# Altium PCB PCB1.PcbDoc
Units mil, origin at the board's own origin, x right, y up, seen from the top; angles counter-clockwise.
Board outline 870.11 x 476.41 mil, 2 copper layers (Top Layer, Bottom Layer); 27 components, 29 nets, 127 pads, 42 vias.
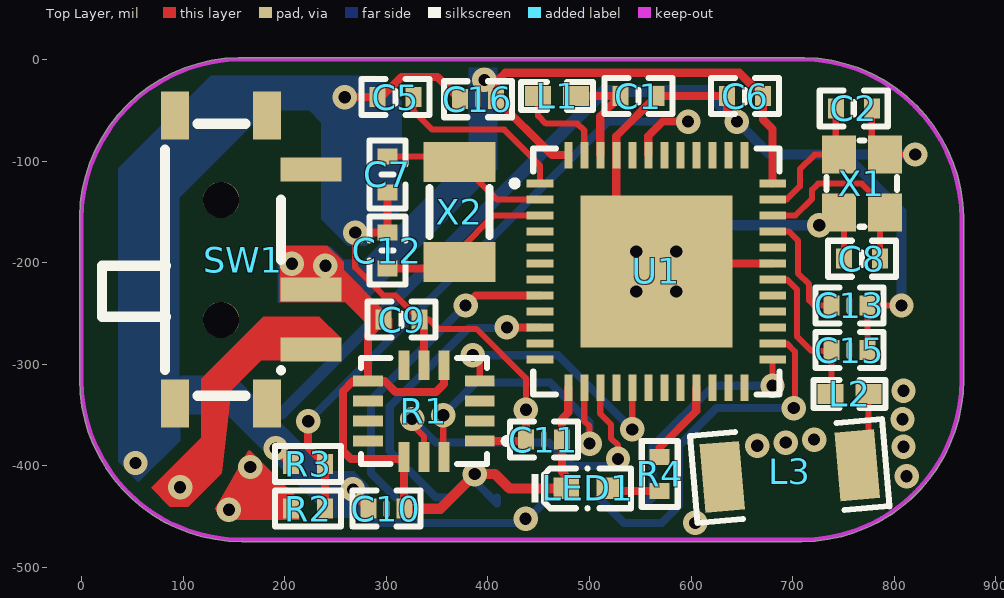
[diagram p0: Top Layer view]
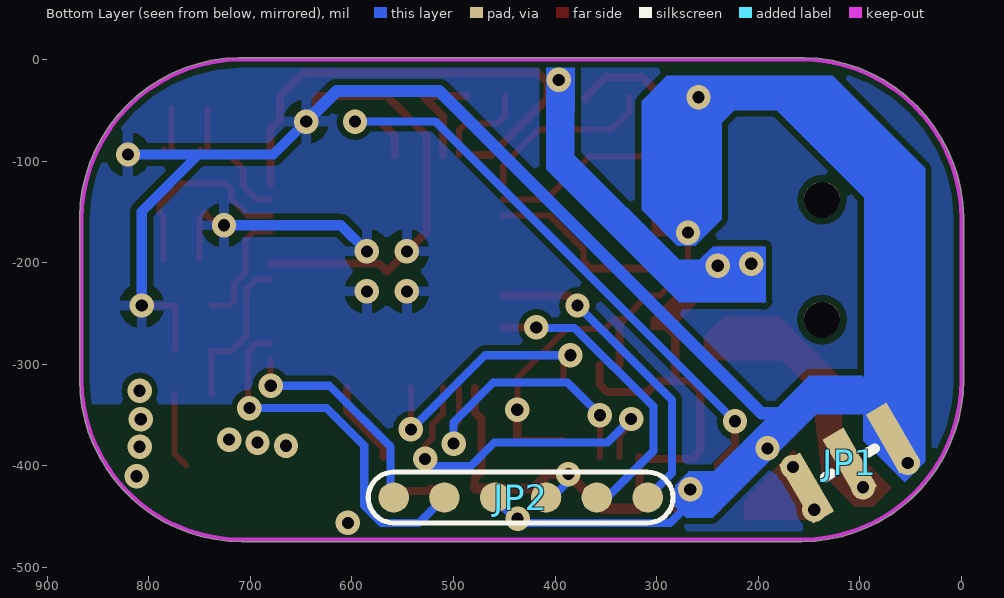
[diagram p1: Bottom Layer view, seen from below]
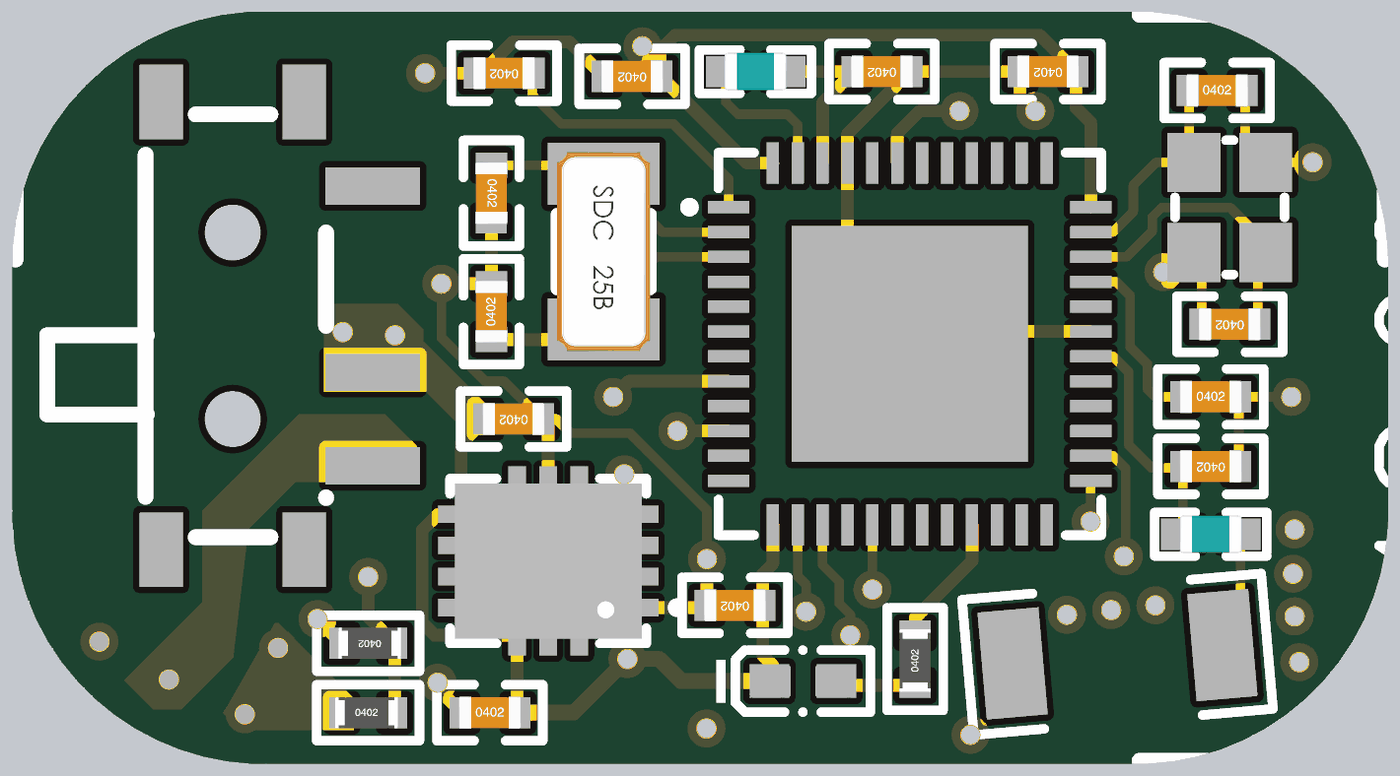
[diagram p2: 3D render of the assembled board from above, using the file's embedded part models]

## Layer stack, top to bottom
Top Solder: solder mask 0.4, Solder Resist, Dk 3.5
Top Layer: signal copper 1.4
Dielectric 1: dielectric 12.6, FR-4, Dk 4.8
Bottom Layer: signal copper 1.4
Bottom Solder: solder mask 0.4, Solder Resist, Dk 3.5

## Board outline
-1.98,-314.96 cw(c0,-314.96) -1.72,-313.98 cw(c0,-313) -1.98,-313 -1.98,-155 cw(c0,-155) -1.96,-154.69 cw(c157.48,-157.48) 154.69,1.96 cw(c155,0) 155,1.98 711,1.98 cw(c711,0) 711.29,1.96 cw(c708.66,-157.48) 868.1,-154.85 cw(c866.14,-155.14) 868.13,-155.14 868.13,-314.86 cw(c866.14,-314.86) 868.12,-314.91 cw(c866.14,-314.96) 868.13,-314.96 cw(c708.66,-314.96) 708.66,-474.42 cw(c708.66,-472.44) 708.61,-474.42 cw(c708.56,-472.44) 708.56,-474.42 159.44,-474.42 cw(c159.44,-472.44) 158.46,-474.17 cw(c157.48,-472.44) 157.48,-474.42 cw(c157.48,-314.96)

## Design rules (kind name [scope] priority, off if disabled: settings)
Clearance [All] p1: gap=6 ignorepadtopadclearanceinfootprint=FALSE except(0: Arc-Hole Track-Hole SMDPad-Hole THPad-Hole Via-Hole Fill-Hole Poly-Hole Region-Hole Text-Hole)
HoleToHoleClearance [All] p1: gap=4 allowstackedmicrovias=TRUE
MinimumSolderMaskSliver [All] p1: minsoldermaskwidth=4
PolygonConnect [All] p1: connectstyle=Relief reliefconductorwidth=10 reliefentries=4 polygonreliefangle="90 Angle" airgapwidth=10
RoutingVias [All] p1: holewidth=12 width=24 viastyle="Through Hole" minholewidth=12 minwidth=24 maxholewidth=15 maxwidth=25
SilkToSilkClearance [All] p1: silktosilkclearance=1
SilkToSolderMaskClearance [IsPad] p1: minsilkscreentomaskgap=0 clearancetoexposedcopper=TRUE
SolderMaskExpansion [All] p1: expansion=4
Width [All] p1: maxlimit=50 minlimit=6 preferedwidth=6
26 further rules are at their usual default settings.

## Components (designator, comment, footprint, x,y, rotation, side; value= is the part's Value field where it differs from the comment)
C1 "1.0µF" "C 0402_L" 548,-36 r180 top value=1.0μF
C2 "12pF" "C 0402_L" 760,-48 r0 top
C5 "100nF" "C 0402_L" 309,-37 r180 top
C6 "4.7µF" "C 0402_L" 653,-36 r180 top value=4.7μF
C7 "12pF" "C 0402_L" 301,-113 r270 top
C8 "12pF" "C 0402_L" 768,-196 r180 top
C9 "2.2uF" "C 0402_L" 315,-256 r180 top
C10 "0.1uF" "C 0402_L" 300,-442 r0 top
C11 "100nF" "C 0402_L" 455,-374 r180 top
C12 "12pF" "C 0402_L" 301,-188 r90 top
C13 "100pF" "C 0402_L" 756,-242 r0 top
C15 "0.8pF" "C 0402_L" 756,-286 r180 top
C16 "100nF" "C 0402_L" 390,-39 r180 top
JP1 "HDR-1X3" bat_3p 46.75,-445.77 r150 bottom
JP2 "HDR-1X6" SWD_nRF52832 559,-431 r270 bottom
L1 "10uH" INDC1005X04L 468,-36 r0 top value=3.9nH
L2 "3.9nH" INDC1005X04L 756,-329 r0 top
L3 "陶瓷天线" ANT-SMD_L3.1-W1.6 697,-405 r5 top
LED1 "白色" LED0402-RD_BLUE 498,-422 r0 top
R1 "ICM-42605/ QMI8658C" ICM-42605 335,-340 r180 top
R2 "20K" "R 0402_L" 222,-442 r0 top
R3 "5K" "R 0402_L" 224,-398 r180 top
R4 "880R" "R 0402_L" 569,-409 r90 top
SW1 "MSK12C02" SW-TH_MSK12C02 159,-197 r270 top
U1 "nRF52832-QFAA" QFN-48_L6.0-W6.0-P0.40-BL-EP3.8 565.61,-208.47 r270 top
X1 "32MHz" BT-XTAL_2016 768,-122 r90 top
X2 "32.768kHz" XTAL_3215 372,-150 r270 top

## Footprints (in the part's own frame and the unit in brackets; to place one, negate y for a bottom-side part, rotate by r counter-clockwise, add the part's x,y. Pads: shape width x height; smd on the part's side, far side on the other; paste and mask are expansions set on the pad)
ANT-SMD_L3.1-W1.6 [mil]
  rect 38.73x68.03 smd: 1(-66.61,0) 2(66.61,0)
  silkscreen extent -95,-43 95,43
bat_3p [mm]
  rect 0.6x1.7 smd: 1(0.478,1.876) 2(-0.772,1.876) 3(-2.022,1.876)
  silkscreen extent -1.49,1.88 -0.05,1.88
BT-XTAL_2016 [mm] "Crystal 2.0 x 1.6 mm"
  rect 0.95x0.85 smd: 1(-0.725,-0.575) 2(0.725,-0.575) 3(0.725,0.575) 4(-0.725,0.575)
  silkscreen extent -1.08,-0.88 1.08,0.88
"C 0402_L" [mm] "无极性贴片电容"
  rect 0.4x0.5 smd: 1(-0.45,0) 2(0.45,0)
  silkscreen extent -0.85,-0.45 0.85,0.45, body extent -0.5,-0.26 0.5,0.26, height 0.53
ICM-42605 [mm]
  rect 0.745x0.28 smd: 1(-1.445,0.901) 2(-1.445,0.401) 3(-1.445,-0.099) 4(-1.445,-0.599) 8(1.35,-0.599) 9(1.35,-0.099) 10(1.35,0.401) 11(1.35,0.901)
  rect 0.28x0.745 smd: 5(-0.548,-0.997) 6(-0.048,-0.997) 7(0.452,-0.997) 12(0.452,1.298) 13(-0.048,1.298) 14(-0.548,1.298)
  silkscreen extent -2.19,-1.18 1.53,1.48, body extent -1.55,-1.1 1.45,1.4, height 0.9
INDC1005X04L [mm] "Chip Inductor, 2-Leads, Body 1.0x0.5mm, IPC High Density"
  rect 0.65x0.5 smd: 1(-0.475,0) 2(0.475,0)
  silkscreen extent -0.9,-0.35 0.9,0.35, body extent -0.5,-0.3 0.5,0.3, height 0.5
LED0402-RD_BLUE [mm]
  rect 0.636x0.54 smd: 1(-0.538,0) 2(0.538,0)
  silkscreen extent -1.39,-0.54 1.09,0.54
QFN-48_L6.0-W6.0-P0.40-BL-EP3.8 [mm]
  rect 0.2x0.665 smd: 1(-2.2,-2.908) 2(-1.8,-2.908) 3(-1.4,-2.908) 4(-1,-2.908) 5(-0.6,-2.908) 6(-0.2,-2.908) 7(0.2,-2.908) 8(0.6,-2.908) 9(1,-2.908) 10(1.4,-2.908) 11(1.8,-2.908) 12(2.2,-2.908) 25(2.2,2.908) 26(1.8,2.908) 27(1.4,2.908) 28(1,2.908) 29(0.6,2.908) 30(0.2,2.908) 31(-0.2,2.908) 32(-0.6,2.908) 33(-1,2.908) 34(-1.4,2.908) 35(-1.8,2.908) 36(-2.2,2.908)
  rect 0.665x0.2 smd: 13(2.908,-2.2) 14(2.908,-1.8) 15(2.908,-1.4) 16(2.908,-1) 17(2.908,-0.6) 18(2.908,-0.2) 19(2.908,0.2) 20(2.908,0.6) 21(2.908,1) 22(2.908,1.4) 23(2.908,1.8) 24(2.908,2.2) 37(-2.908,2.2) 38(-2.908,1.8) 39(-2.908,1.4) 40(-2.908,1) 41(-2.908,0.6) 42(-2.908,0.2) 43(-2.908,-0.2) 44(-2.908,-0.6) 45(-2.908,-1) 46(-2.908,-1.4) 47(-2.908,-1.8) 48(-2.908,-2.2)
  rect 3.8x3.8 smd: 49(0,0)
  silkscreen extent -3.08,-3.61 3.08,3.08
"R 0402_L" [mm] "1/16W贴片电阻"
  rect 0.4x0.5 smd: 1(-0.4,0) 2(0.45,0)
  silkscreen extent -0.8,-0.45 0.85,0.45, body extent -0.5,-0.25 0.5,0.25, height 0.3
SW-TH_MSK12C02 [mm]
  rect 0.6x1.524 smd: 1(-2.25,1.7) 2(0.75,1.7) 3(2.25,1.7)
  rect 1.2x0.7 smd: 4(-3.6,-1.7) 4(-3.6,0.6) 4(3.6,-1.7) 4(3.6,0.6)
  round 0.9 hole 0.9 unplated: ""(-1.5,-0.55) ""(1.5,-0.55)
  silkscreen extent -3.4,-3.53 3.4,0.95
SWD_nRF52832 [mil]
  round 30 smd: 1(0,0) 2(0,50) 3(0,100) 4(0,150) 5(0,200) 6(0,250)
  silkscreen extent -25,-25 25,275
XTAL_3215 [mm] "XTAL SMD 3.2 x 1.5 mm"
  rect 1x1.8 smd: 1(-1.25,0) 2(1.25,0)
  silkscreen extent -0.6,-0.75 0.6,0.75, body extent -1.6,-0.75 1.6,0.75, height 0.81

## Part data
C1: library part C0603-1μ0, "Capacitor, X7R, ±10%", Artikkelnr Noca=20039335, Artikkelnr Simpro=N.A., Footprint Doc=0603, LatestRevisionDate=2013-06-05, Note=16V, Part Number=C0603-1μ0, Pin Count=2, Published=2009-05-08, Publisher="Nordic Semiconductor"
C2 C7 C8 C12: library part C0402-12p, "Capacitor, NP0, ±2%", Artikkelnr Noca=20029159, Artikkelnr Simpro=N.A., Footprint Doc=0402, LatestRevisionDate=2011-05-11, Note=50V, Part Number=C0402-12p, Pin Count=2, Published=2009-05-08, Publisher="Nordic Semiconductor"
C5 C11 C16: library part C0402-100n, "Capacitor, X7R, ±10%", Artikkelnr Noca=20039200, Artikkelnr Simpro=N.A., Footprint Doc=0402, LatestRevisionDate=2009-11-23, Note=16V, Part Number=C0402-100n, Pin Count=2, Published=2009-05-08, Publisher="Nordic Semiconductor"
C6: library part C0603-4μ7, "Capacitor, X5R, ±10%", Artikkelnr Noca=20069060, Artikkelnr Simpro=N.A., Footprint Doc=0603, LatestRevisionDate=2009-11-23, Note=6.3V, Part Number=C0603-4μ7, Pin Count=2, Published=2009-05-08, Publisher="Nordic Semiconductor"
C9 C10: library part Cap, "Capacitor", LatestRevisionDate=17-Jul-2002, LatestRevisionNote="Re-released for DXP Platform.", PackageDescription="Radial Cap, Thru-Hole; 2 Leads; 0.3 in Pin Spacing", PackageReference=RAD-0.3, Published=8-Jun-2000, Publisher="Altium Limited"
C13: library part C0402-100p, "Capacitor, NP0, ±5%", Artikkelnr Noca=20029135, Artikkelnr Simpro=N.A., Footprint Doc=0402, LatestRevisionDate=2009-05-08, Note=50V, Part Number=C0402-100p, Pin Count=2, Published=2009-05-08, Publisher="Nordic Semiconductor"
C15: library part C0402-0.8p, "Capacitor, NP0, ±5%", Artikkelnr Noca=20029147, Artikkelnr Simpro=N.A., Footprint Doc=0402, LatestRevisionDate=2012-11-21, Note=50V, Part Number=C0402-0.8p, Pin Count=2, Published=2009-05-08, Publisher="Nordic Semiconductor"
JP1: library part "Header 3", "3P接插件", BOM名称=3P接插件, 学习资源=www.ooocke.com, 版权归属=源创客
JP2: library part "Header 6", "6P接插件", BOM名称=6P接插件, 学习资源=www.ooocke.com, 版权归属=源创客
L1 L2: library part L0402-3n9, "High frequency chip inductor ±5%", Manufacturer=Murata, Manufacturer Part Number=LQP15MN3N9B02D, Supplier part number=490-1131-1-ND, Artikkelnr Noca=33029151, Artikkelnr Simpro=N.A., Datasheet=http://search.murata.co.jp/Ceramy/image/img/PDF/ENG/L0075S0084LQP15M.pdf, Footprint Doc=0402, LatestRevisionDate=2012-09-19, Note="High frequency chip inductor ±5%", Part Number=L0402-3n9, Pin Count=2, Published=2009-05-08, Publisher="Nordic Semiconductor", Supplier=Digi-Key
L3: library part Huaxin, BOM_JLCPCB Part Class="Extended Part", BOM_Manufacturer="Huaxin S&T", BOM_Manufacturer Part=RFECA3216060A1T, BOM_Supplier=LCSC, BOM_Supplier Part=C127620, Contributor=LCSC, nameAlias=Value, spicePre=L, spiceSymbolName=RFECA3216060A1T
LED1: library part LED-SMD, "贴片LED", BOM名称=贴片LED, 学习资源=www.ooocke.com, 版权归属=源创客
R1: library part ICM-42605, BOM_JLCPCB Part Class="Extended Part", BOM_Manufacturer=InvenSense, BOM_Manufacturer Part=ICM-42605, BOM_Supplier=LCSC, BOM_Supplier Part=C2655099, Contributor=LCSC, spicePre=R, spiceSymbolName=ICM-42605
R2 R3 R4: library part R, "贴片电阻", BOM名称=贴片电阻, 学习资源=www.ooocke.com, 版权归属=源创客
SW1: BOM_JLCPCB Part Class="Extended Part", BOM_Manufacturer="SHOU HAN(首韩)", BOM_Manufacturer Part=MSK12C02, BOM_Supplier=LCSC, BOM_Supplier Part=C431540, Contributor=LCSC, spicePre=S, spiceSymbolName=MSK12C02
U1: "Multi-protocol Bluetooth Low Energy, ANT and 2.4GHz proprietary system-on-chip", Manufacturer="Nordic Semiconductor", Artikkelnr Noca=N.A., Artikkelnr Simpro=N.A., Footprint Doc=QFN-48, LatestRevisionDate=2014-11-26, Manufacturer Part Number=nRF52832-QFAA, Part Number=nRF52832-QFAA, Pin Count=48, Published=2014-11-26, Publisher="Nordic Semiconductor", Supplier="Nordic Semiconductor"
X1: library part XTAL_SMD2016_32MHz_8pF_General, "XTAL SMD 2016, 32MHz, Cl=8pF, Total Tol: ±40ppm", Artikkelnr Noca=N.A., Artikkelnr Simpro=N.A., Footprint Doc=XTAL_2016, LatestRevisionDate=2016-08-19, Note="XTAL SMD 32.000MHz", Part Number=XTAL_SMD2016_32MHz_8pF_General, Pin Count=4, Published=2016-08-19, Publisher="Nordic Semiconductor"
X2: library part XTAL_SMD3215_32.768kHz_9pF_General, "XTAL SMD 3215, 32.768kHz, Cl=9pF, Total Tol: ±50ppm", Artikkelnr Noca=N.A., Artikkelnr Simpro=N.A., Footprint Doc=XTAL_3215, LatestRevisionDate=2016-08-19, Note="XTAL SMD 32.768kHz", Part Number=XTAL_SMD3215_32.768kHz_9pF_General, Pin Count=2, Published=2016-08-19, Publisher="Nordic Semiconductor"

## Via types
v1: diameter 24, hole 12, Top Layer to Bottom Layer, tented both sides, 38 vias
v2: diameter 24, hole 12, Top Layer to Bottom Layer, 4 vias

## Nets (pads, with @x,y where several pads share a name; then routed paths per layer and width w, separated by ;. In a path a pad name is that pad's centre, name@x,y a point inside that pad or via, vN(x,y) a via of type N, cw(c..) or ccw(c..) an arc to the next point about the centre after c; other vN are vias at no path point)
BAT_ADC: R2.2 R3.1 U1.43 | length 653.1
  Top Layer w8: v1(223,-356) 223,-381.25 R3.1 239.75,-441.97 R2.2 ; U1.43 557.74,-75.26 572,-61 v1(597,-61)
  Bottom Layer w8: v1(223,-356) 518,-61 v1(597,-61)
GND: C1.1 C2.2 C5.2 C6.2 C7.2 C8.2 C9.1 C10.1 C11.2 C12.2 C13.2 C15.1 C16.2 JP1.1 JP2.3 R1.1 R1.6 R3.2 U1.31 U1.45 U1.49 X1.2 X1.4 | length 2671.2
  Top Layer w6: v1(269.29,-170.29) 269.29,-204.45 296.84,-232 308.72,-232 C9.1 342,-256 351,-265 388.7,-265 437.29,-313.59 v1(437.29,-344.71) ; v1@723,-167 728.91,-167 X1.4@744.86,-151.04 ; X1.4@744.36,-150.54 X1.4@744.86,-151.04 ; X1.4 X1.4@744.86,-151.04 ; C8.2 750.29,-156.47 X1.4@744.86,-151.04 ; C15.1 C13.2 v1(807,-242) ; X1.2@777.71,-89.53 C2.2 ; X1.2@784.71,-88.53 X1.2@789.64,-93.46 ; X1.2 v1(820.46,-93.46)
  Top Layer w8: v1(191,-382.71) R3.2 ; v1(259,-37) C5.2 294.86,-37 314.7,-17.16 350.16,-17.16 370.29,-37.29 C16.2@370.29,-39 ; v1(267,-423) 271,-427 271,-430.72 C10.1 ; v1(269.29,-170.29) C12.2 C7.2 ; C9.1 336.89,-260.17 R1.6 ; R1.1 435.82,-375.46 C11.2 v1(437.29,-344.71) ; v1(645,-61) 635.29,-51.29 C6.2 C1.1 526.24,-75.47 U1.45 526.24,-169.1 U1.49 573.49,-200.59 U1.31
  Bottom Layer w8: v1(267,-423) 267,-436 287,-456 433,-456 v1(437,-452) v1@439,-452 ; v1@444,-451 441,-454 v1@439,-452 ; JP2.3 459,-432 v1@439,-452
  Bottom Layer w10: v2(585.29,-188.79) 611.08,-163 v1(726,-163) ; v1(645,-61) 677.46,-93.46 751,-93.46 ; v1(807,-242) 807,-149.45 751,-93.46 ; v1(820.46,-93.46) 751,-93.46
  Bottom Layer w12: 163,-348 197.06,-348 514.06,-31 615,-31 v1(645,-61)
  other v1: 53,-397
  other v2: 545.92,-228.16 585.29,-228.16 545.92,-188.79
INT0: R1.4 U1.17 | length 248.8
  Top Layer w6: R1.4 v1@391.91,-295.91 ; v1(542,-364) U1.17
  Bottom Layer w8: v1(385,-291) 469,-291 v1(542,-364)
LED-B: U1.23
LED-G: U1.22
LED-R: R4.2 U1.21 | length 83.3
  Top Layer w8: R4.2 569,-382 604.98,-346.02 U1.21
NetC1_2: C1.2 L1.2 U1.46 | length 109.8
  Top Layer w8: L1.2 C1.2 510.5,-55.79 U1.46
NetC2_1: C2.1 U1.35 X1.3 | length 140.8
  Top Layer w6: U1.35 694.09,-137.6 707,-124.69 707,-108 721.54,-93.46 744.36,-93.46 X1.3@749.28,-88.54 ; X1.3@742.28,-89.54 C2.1
NetC5_1: C5.1 U1.1 | length 178
  Top Layer w6: C5.1 326.72,-50.72 345,-69 416,-69 451.15,-104.14 U1.1
NetC7_1: C7.1 U1.2 X2.1 | length 167.7
  Top Layer w6: C7.1 366.5,-95.28 X2.1 408.82,-137.6 U1.2
NetC8_1: C8.1 U1.34 X1.1 | length 190.8
  Top Layer w6: U1.34 702.65,-153.35 719,-137 719,-128 725,-122 768,-122 789.64,-143.64 789.64,-150.54 785.72,-154.46 C8.1
NetC12_1: C12.1 U1.3 X2.2 | length 179
  Top Layer w6: X2.2 372,-187 405.65,-153.35 U1.3
  Top Layer w8: C12.1 365.5,-205.72 X2.2
NetC13_1: C13.1 U1.33 | length 116.5
  Top Layer w6: U1.33 696.1,-169.1 705,-178 705,-210.28 716,-221.28 716,-237 721,-242 C13.1
NetC15_2: C15.2 L2.1 U1.30 | length 158.3
  Top Layer w6: U1.30 694.09,-216.34 704,-226.25 704,-272.27 718.73,-287 737.28,-287 C15.2 738.29,-328.01 L2.1
NetL1_1: L1.1 U1.47 | length 95
  Top Layer w6: L1.1 449.3,-55.3 457,-63 488,-63 494.75,-69.75 U1.47
NetL2_2: L2.2 L3.2 | length 74.9
  Top Layer w6: L3.2 774.7,-387.85 L2.2
NetLED1_2: LED1.2 R4.1 | length 48
  Top Layer w8: LED1.2@522.19,-422 524.94,-424.75 R4.1
P0.28/AIN4: U1.40
P0.29/AIN5: U1.41
P0.30/AIN6: U1.42
RX: JP2.5 U1.10 | length 298.5
  Top Layer w8: v1(418.59,-263.59) U1.10
  Bottom Layer w8: JP2.5 349,-431 303.29,-385.29 303.29,-341.6 380.89,-264 418.17,-264 v1(418.59,-263.59)
SCL0: R1.13 U1.15 | length 347.1
  Top Layer w6: v1@327,-353 327,-361 336.89,-370.89 R1.13 ; U1.15 510.5,-348.53 521,-359.03 521,-372.7 528,-379.7 v1@528,-387 ; v1@527,-388 v1@528,-387 ; v1(528,-393) v1@528,-387 ; v1@529,-386 v1@528,-387
  Bottom Layer w8: v1(325.29,-353.71) 348.57,-377 460,-377 483,-400 521,-400 v1(528,-393)
SDA0: R1.14 U1.14 | length 298
  Top Layer w6: v1@351,-350 v1(356,-350) 356,-390.54 R1.14 ; U1.14 494.75,-355.75 500,-361 v1(500,-378)
  Bottom Layer w8: v1(356,-350) 388,-318 461,-318 500,-357 v1(500,-378)
SWDCLK: JP2.1 U1.25 | length 230.3
  Top Layer w6: v1(680,-321) 680.08,-320.92 U1.25
  Bottom Layer w8: JP2.1@556,-437 JP2.1@562,-431 ; JP2.1 JP2.1@562,-431 ; v1(680,-321) 622,-321 562,-381 JP2.1@562,-431
SWDIO: JP2.2 U1.26 | length 365.2
  Top Layer w6: U1.26 694.09,-279.34 702.17,-287.42 702.17,-341.83 v1(701,-343)
  Bottom Layer w8: JP2.2 534,-456 571,-456 588,-439 588,-380 625,-343 v1(701,-343)
TX: JP2.6 U1.8 | length 314.7
  Top Layer w8: v1(378,-242) 387.91,-232.09 U1.8
  Bottom Layer w8: JP2.6 285,-407 285,-335 v1(378,-242)
VBAT: JP1.3 R2.1 | length 61.7
  Top Layer w8: v1(145,-443) 146,-442 R2.1
  other v1: 166,-401
VDD_nRF: C6.1 C9.2 C10.2 C11.1 C16.1 JP2.4 LED1.1 R1.5 R1.8 R1.12 SW1.2 U1.13 U1.36 U1.48 | length 1272.8
  Top Layer w8: C9.2 281.87,-271.41 R1.8 ; R1.12 R1.12@317.2,-393 ; C10.2 317.2,-441.49 R1.12@317.2,-393 ; R1.5 356.57,-319.43 349,-327 309,-327 298.41,-316.41 R1.8 ; v1(396.43,-19.97) v1@405.43,-19.97 ; 409.97,-20 416.97,-13 647.72,-13 C6.1 670.72,-59 680.08,-68.37 U1.36 ; 409.94,-19.97 v1@405.43,-19.97 ; LED1.1@479,-421.19 479,-412 472.72,-405.72 C11.1 472.72,-353.78 479,-347.5 U1.13 ; U1.48 462.94,-94 407.94,-39 C16.1 407.72,-22.25 v1@405.43,-19.97 ; R1.8 267.23,-316.41 257.2,-326.44 257.2,-385.2 265,-393 R1.12@317.2,-393
  Top Layer w10: SW1.2 267.82,-226.53 C9.2 ; C10.2 353,-442 v1(387,-408) 407,-408 421,-422 LED1.1 478.19,-422 LED1.1@479,-421.19
  Bottom Layer w8: v1(387,-408) 387,-415 409,-437 JP2.4
  other v1: 240,-203 207,-201
VIN: JP1.2 SW1.3
  other v1: 97,-421
pads on no net: L3.1 R1.2 R1.3 R1.7 R1.9 R1.10 R1.11 SW1. SW1.1 SW1.4 U1.4 U1.5 U1.6 U1.7 U1.9 U1.11 U1.12 U1.16 U1.18 U1.19 U1.20 U1.24 U1.27 U1.28 U1.29 U1.32 U1.37 U1.38 U1.39 U1.44
copper on no net:
  other v1: 604,-456 812,-410 809,-381 665,-380 693,-377 721,-374 808,-354 809,-326

## Polygon pours and split planes (outlines as drawn)
GND on Bottom Layer "GND_L02_P000" (solid, pour order 0): 858,-339 858,-91 770,-3 93,-3 -1,-97 -1,-370 100,-471 101,-470 597,-470 600,-467 599,-466 599,-379 639,-339

## Keep-outs
Keep-Out Layer:
  lines w3.94: 0,-314.96 ccw(c157.48,-314.96) 157.48,-472.44 ; 0,-313 0,-155 ; 0,-157.48 cw(c157.48,-157.48) 157.48,0 ; 155,0 711,0 ; 159.44,-472.44 708.56,-472.44 ; 708.66,-472.44 ccw(c708.66,-314.96) 866.14,-314.96 ; 708.66,0 cw(c708.66,-157.48) 866.14,-157.48 ; 866.14,-314.86 866.14,-155.14

## Other copper
Top Layer:
  region net VDD_nRF: 195,-239 259.72,-239 287,-266.28 306,-266 306,-255 247,-196 195,-196
  region net VDD_nRF: 195,-184 196,-183 242,-183 258,-199 258,-239 195,-239
  region net VBAT: 164,-385 134,-437.5 131,-442 142,-453 214,-453 214,-435 215,-434 166,-385
  region net VIN: 254,-273 234,-253 179,-253 118,-314 118,-372 68.5,-421.5 87,-440 105,-440 137.75,-407.25 147.32,-325.68 177,-296 253,-296 254,-295
Bottom Layer:
  region net GND: 36,-107 127,-16 290,-16 315,-41 315,-148 280,-183 262,-183 236,-157 236,-62 224,-50 182,-50 96,-136 96,-324.5 36,-384.5
  region net VDD_nRF: 381,-8 381,-94 278,-197 240,-197 240,-237 242,-239 278,-239 409,-108 409,-8
  region net VDD_nRF: 192,-238 193,-239 258,-239 258,-197 245,-184 193,-184 193,-238 195,-240
  region net GND: 36,-396 36,-373 98,-311 150,-311 244,-405 269,-405 269,-406 282,-419 282,-440 271,-451 245,-451 143,-349 97,-349 97,-375 56,-416

## Dimensions
711,0 to 708.56,-472.44 on Top Overlay
0,-155 to 866.14,-155.14 on Top Overlay